# Allegro board Vpwr_v1_2.brd
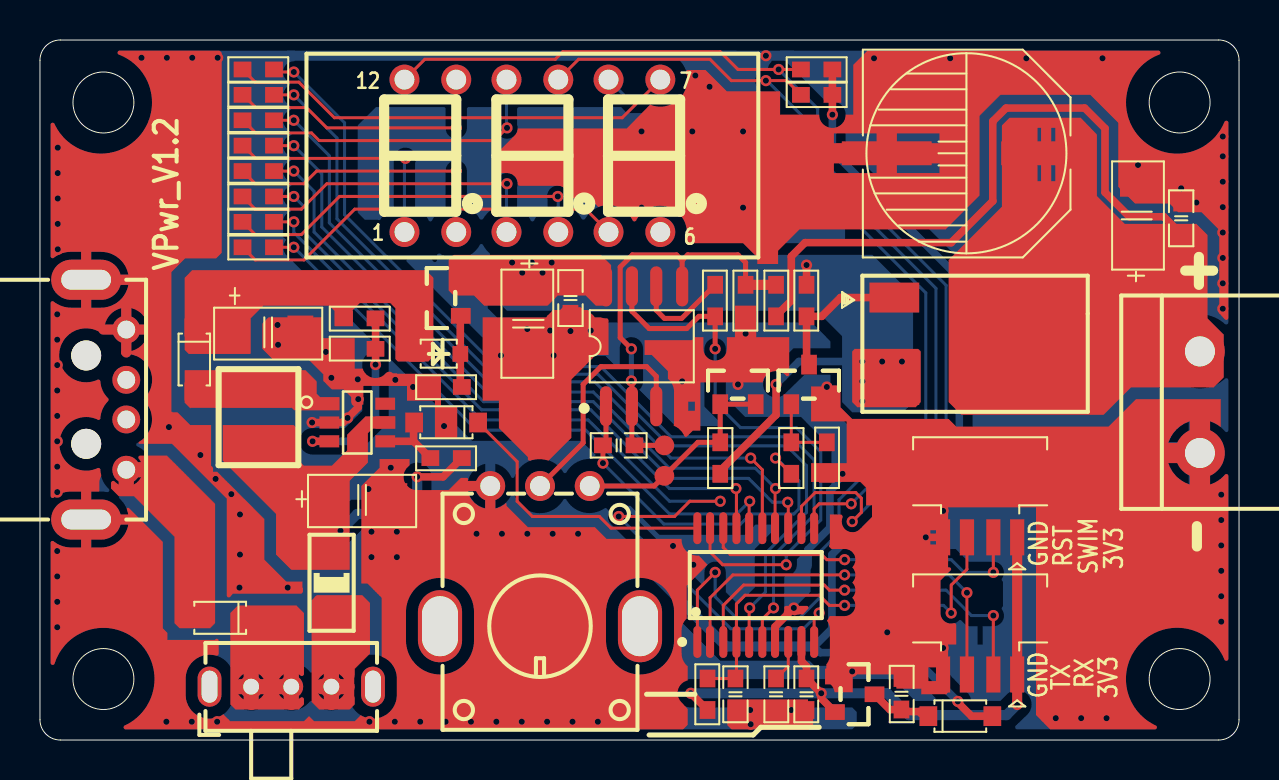
[diagram p0: board, top side]
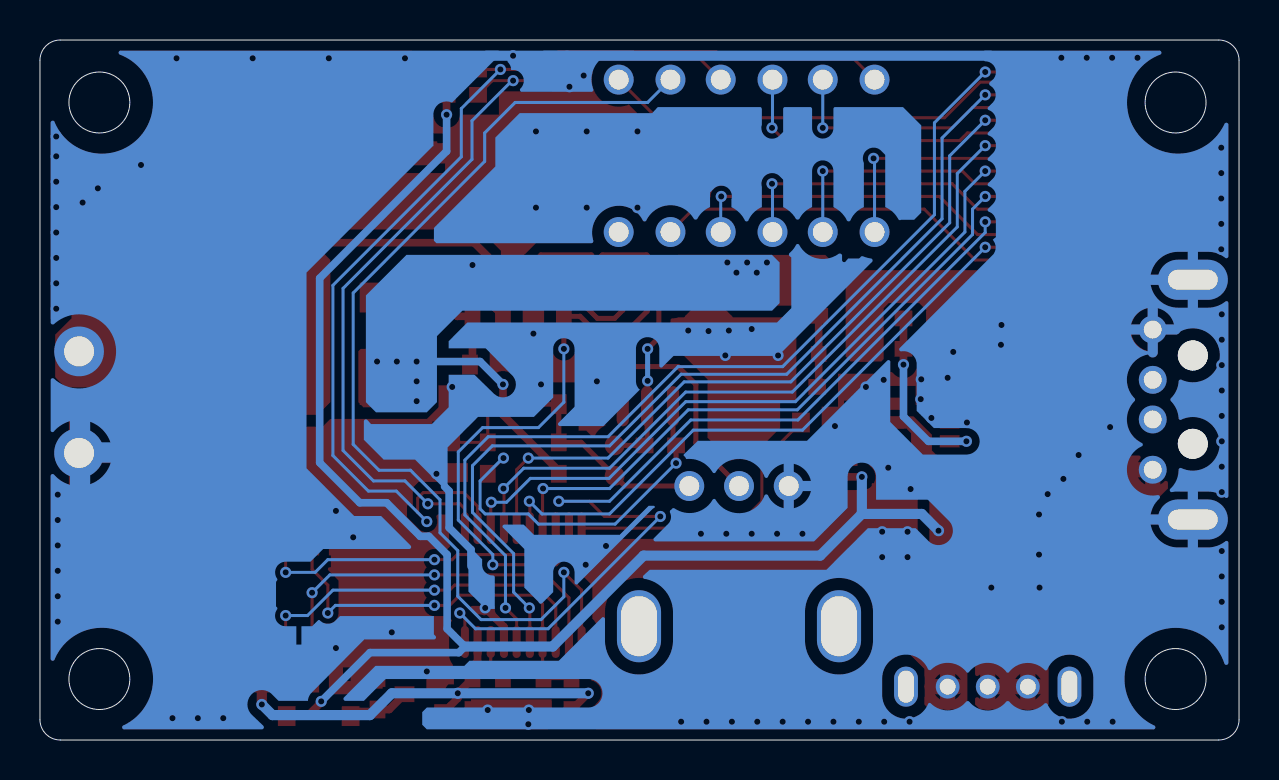
[diagram p1: board, bottom side, seen from below]

Outline 59.99 x 35 mm; copper layers: TOP, BOTTOM. Coordinates in mm from the lower left corner of the outline.
Outline path: circle c3.17,31.88 r1.52 ; circle c3.17,3.05 r1.52 ; circle c57.02,31.88 r1.52 ; circle c57.02,3.05 r1.52 ; 0,33.99 0,1.02 arc(0.3,0.3) 1.02,0 58.98,0 arc(59.7,0.3) 59.99,1.02 59.99,33.99 arc(59.7,34.7) 58.98,35 1.02,35 arc(0.3,34.7) 0,33.99

## Design rules (mm)
net group POWER: nets GND VCPU VIN VIN_12V VOUT VUSB

## Placement (name value [footprint] x y rotation side)
C1  1uF/10V  [C0603]  36.83 2.29 270 top
C2  0.1uF/50V  [C0603]  26.54 22.1 270 top
C3  1uF/16V  [C0603]  43.1 2.31 270 top
C4  0.1uF/50V  [C0603]  34.8 2.29 270 top
C5  1uF/16V  [C0603]  38.35 2.29 90 top
C6  22uF  [TA3216]  16.13 11.94 0 top
C7  22uF/25V  [TA3216]  11.43 20.32 0 top
C8  22uF/25V  [TA3216]  24.38 20.83 270 top
C9  470uF/25V  [C_SMD_10X10_3]  46.35 29.34 180 top
C10  22uF/25V  [TA3216]  54.94 26.21 90 top
C11  0.1uF/50V  [C0603]  57.1 26.09 90 top
C12  0.01uF/50V  [C0603]  28.96 14.73 0 top
D1  SS14  [SOD123]  9.02 6.1 0 top
D2  SS14/NC  [SOD123]  20.32 15.88 0 top
D3  MM3Z9V1/NC  [SOD323]  19.94 19.3 0 top
D4  SS14  [SOD123]  7.72 19.02 90 top
D5  SS14  [SOD123]  46.05 1.19 180 top
DS1  SLR0283DBA1BD  [LED-SEG-TH_SLR0283DBA1BD]  24.64 29.21 0 top
F1  1A/16V  [FULSE1206]  14.61 7.87 90 top
J1  Download  [1_25_PWT_4P]  46.99 12.83 180 top
J2  UART1  [1_25_PWT_4P]  46.99 5.97 180 top
J3  B2S  [CH5R08-2A]  58.04 16.89 90 top
L1  4.7uH  [SM3521]  10.92 16.13 90 top
NOREF  -  []  0 33.99 0 top
NOREF#2  -  []  1.02 0 90 top
Q1  2SB772-P  [TO252-132]  45.85 19.81 270 top
Q2  AO3401  [SOT-23]  20.07 22.1 90 top
Q3  MMBT5551  [SOT-23]  38.48 17.78 0 top
Q4  TL431ACD  [SOT-23]  34.92 17.78 0 top
R1  10K  [R0603]  33.4 2.29 270 top
R2  100R  [R0603]  10.92 32.26 0 top
R3  100R  [R0603]  10.92 33.53 0 top
R4  100R  [R0603]  10.92 25.91 0 top
R5  100R  [R0603]  10.92 28.45 0 top
R6  100R  [R0603]  10.92 29.72 0 top
R7  100R  [R0603]  10.92 30.99 0 top
R8  100R  [R0603]  10.92 24.64 0 top
R9  100R  [R0603]  10.92 27.18 0 top
R10  191K/1%  [R0603]  16 21.08 180 top
R11  100K  [R0603]  20.32 14.1 180 top
R12  10K/1%  [R0603]  16 19.56 0 top
R13  3K  [R0603]  34.04 14.1 270 top
R14  10K  [R0603]  38.35 21.97 90 top
R15  3K/1%  [R0603]  36.83 21.97 270 top
R16  3K  [R0603]  37.59 14.1 90 top
R17  10K  [R0603]  20.32 17.65 0 top
R18  3K  [R0603]  39.37 14.1 90 top
R19  1K/1%  [R0603]  35.31 21.97 90 top
R20  100R  [R0603]  33.78 21.97 90 top
R21  200R  [R0603]  38.86 33.53 180 top
R22  200R  [R0603]  38.86 32.26 180 top
SW1  SPDT-SW  [SK-12D02-VG3]  12.57 2.67 0 top
TP1  VUSB_IN  [TP-40MIL-SMT]  7.37 7.87 0 top
TP2  VUSB  [TP-40MIL-SMT]  12.57 10.41 0 top
TP3  VIN_12V  [TP-40MIL-SMT]  8.05 22.48 0 top
TP4  VIN  [TP-40MIL-SMT]  22.48 23.37 0 top
TP5  VOUT  [TP-40MIL-SMT]  52.7 26.29 0 top
TP6  TEST_POINT  [TP-40MIL-SMT]  31.24 13.21 90 top
TP7  FEEDBACK  [TP-40MIL-SMT]  31.24 14.73 0 top
U1  STM8S103F3P6  [TSSOP-20]  35.81 7.75 0 top
U2  SC662K-3.3V  [SOT-23]  40.77 2.29 270 top
U3  SX1308  [SOT-23-6]  15.88 15.88 0 top
U4  LM358  [SOIC-8]  30.23 19.68 90 top
USB1  USB_A  [USB-A-M-DIP]  4.32 17.02 270 top
VR1  10K  [RK09K]  25.02 12.7 180 top

## Library data of the parts
C1-C5 C11 C12 = CAP NP
C6-C8 C10 = CAP TAC
C9 = CAP POL
D1 D2 D4 D5 = DIO_SCHOTTKY_0
D3 = DIO_ZENER
DS1 = SLR0283DBA1BD
F1 = FUSE_0
J1 J2 = SMT-CON-4P-1R25
J3 = B2S
L1 = INDUCTANCE
Q1 = PNP
Q2 = AO3401
Q3 = NPN
Q4 = TL431ACD
R1-R22 = R
SW1 = SPDT-SW
TP1-TP7 = TEST_POINT
U1 = STM8S103F3P6: User Part Number: partnum; Tolerance: RichardLC
U2 = SC662K-3.3V
U3 = SX1308
U4 = LM358
USB1 = USB_A
VR1 = POT_R_S

## Footprints (pads in the part's own frame, mm; a bottom-side part is the same pattern mirrored in y, then rotated)
1_25_PWT_4P
  rect 0.711x1.803 smd: 1(-1.905,2.692) 2(-0.711,2.692) 3(0.61,2.692) 4(1.803,2.692)
  rect 2.108x2.997 smd: 5(-4.699,-0.406) 6(4.597,-0.406)
C0603
  rect 0.889x0.787 smd: 1(-0.787,0) 2(0.787,0)
C_SMD_10X10_3
  rect 4.496x1.194 smd: 1(-3.988,0) 2(3.988,0)
CH5R08-2A
  round 2.489 hole 1.499: 1(-2.54,0) 2(2.54,0)
FULSE1206
  rect 1.397x1.702 smd: 1(-1.397,0) 2(1.397,0)
LED-SEG-TH_SLR0283DBA1BD
  round 1.499 hole 0.991: 1(-6.401,-3.81) 2(-3.81,-3.81) 3(-1.295,-3.81) 4(1.295,-3.81) 5(3.81,-3.81) 6(6.401,-3.81) 7(6.401,3.81) 8(3.81,3.81) 9(1.295,3.81) 10(-1.295,3.81) 11(-3.81,3.81) 12(-6.401,3.81)
R0603
  rect 0.889x0.787 smd: 1(-0.787,0) 2(0.787,0)
RK09K
  oval 2.21x3.607 hole 1.803x2.997: (-5.004,7.01) (5.004,7.01)
  round 1.499 hole 0.991: 1(-2.489,0) 2(0,0) 3(2.489,0)
SK-12D02-VG3
  round 1.194 hole 0.787: 1(-2.007,0) 2(0,0) 3(2.007,0)
  oval 1.194x2.007 hole 0.787x1.6: 4(-4.089,0) 5(4.089,0)
SM3521
  rect 1.6x3.302 smd: 1(-1.295,0) 2(1.295,0)
SOD123
  rect 0.889x0.991 smd: 1(-1.6,0) 2(1.6,0)
SOD323
  rect 0.787x0.787 smd: 1(-1.092,0) 2(1.092,0)
SOIC-8
  oval 2.007x0.61 smd: 1(-2.997,1.905) 2(-2.997,0.61) 3(-2.997,-0.61) 4(-2.997,-1.905) 5(2.997,-1.905) 6(2.997,-0.61) 7(2.997,0.61) 8(2.997,1.905)
SOT-23
  rect 0.787x0.991 smd: 1(-0.889,-0.991) 2(0.889,-0.991) 3(0,0.991)
SOT-23-6
  rect 0.991x0.61 smd: 1(-1.397,0.94) 2(-1.397,0) 3(-1.397,-0.94) 4(1.397,-0.94) 5(1.397,0) 6(1.397,0.94)
TA3216
  rect 1.295x1.803 smd: 1(-1.6,0) 2(1.6,0)
TO252-132
  rect 1.499x2.489 smd: 1(-2.311,-3.099) 2(2.311,-3.099)
  rect 6.096x6.604 smd: 3(0,3.099)
TP-40MIL-SMT
  round 0.991 smd: 1(0,0)
TSSOP-20
  oval 0.406x1.6 smd: 1(-2.921,-2.845) 2(-2.286,-2.845) 3(-1.626,-2.845) 4(-0.965,-2.845) 5(-0.33,-2.845) 6(0.33,-2.845) 7(0.965,-2.845) 8(1.626,-2.845) 9(2.286,-2.845) 10(2.921,-2.845) 11(2.921,2.845) 12(2.286,2.845) 13(1.626,2.845) 14(0.965,2.845) 15(0.33,2.845) 16(-0.33,2.845) 17(-0.965,2.845) 18(-1.626,2.845) 19(-2.286,2.845) 20(-2.921,2.845)
USB-A-M-DIP
  round 1.499 hole 1.499 unplated: (-2.21,-2.007) (2.21,-2.007)
  round 1.397 hole 0.889: 1(3.505,0) 2(0.991,0) 3(-0.991,0) 4(-3.505,0)
  oval 2.007x3.505 hole 0.991x2.489: 5(-5.994,-2.007) 6(5.994,-2.007)

## Nets
GND: C1.2 C2.2 C3.1 C4.2 C5.1 C6.2 C7.2 C8.2 C9.2 C10.2 C11.2 J1.4 J1.5 J1.6 J2.4 J2.5 J2.6 J3.1 Q3.2(EMITTER) Q4.3(A) R12.1 R17.1 R18.1 R19.1 U1.7(VSS) U2.1(GND) U3.2(GND) U4.4(VEE/GND) USB1.4(GND) USB1.5 USB1.6 VR1.3(B)
VIN: C2.1 C8.1 Q1.2(EMITTER) Q2.2(S) R13.2 R14.2 TP4.1 U4.8(VCC)
VIN_12V: C7.1 D3.1(CATHODE) D4.2(CATHODE) Q2.3(D) R10.2 TP3.1
FEEDBACK: C12.2 R15.1 R19.2 TP7.1 U4.2(PA-) U4.5(PB+)
NRST: C4.1 J1.3 R1.1 U1.4(NRST)
PA1: R2.2 U1.5(OSCIN/PA1)
PA2: R3.2 U1.6(OSCOUT/PA2)
PA3: R4.2 U1.10(PA3(HS)/TIM2_CH3/[SPI_NSS])
PB4: DS1.12(S1) R21.2 U1.12([ADC_ETR]I2C_SCL/(T)PB4)
PB5: DS1.9(S2) R22.2 U1.11([TIM1_BKIN]I2C_SDA /(T)PB5)
PC3: R5.2 U1.13([TIM1_CH1N][TLI]/TIM1_CH3/(HS)P)
PC4: R6.2 U1.14([TIM1_CH2N][AIN2]/CLK_CCO/TIM1_)
PC5: R7.2 U1.15([TIM2_CH1]SPI_SCK/(HS)PC5)
PC6: R8.2 U1.16([TIM1_CH1]/SPI_MOSI/(HS)PC6)
PC7: R9.2 U1.17([TIM1_CH2]SPI_MISO/(HS)PC7)
PD4: DS1.8(S3) U1.1(PD4(HS)/BEEP/TIM2_CH1 /UART1_CK)
PWR_ADC: R20.1 U1.19([TIM2_CH3][AIN3]/(HS)PD2) U4.7(OUTB)
PWR_EN: D2.2(CATHODE) U1.20(ADC_ETR/TIM2_CH2/AIN4/(HS)PD3)
SWIM: J1.2 U1.18(SWIM/(HS)PD1)
UART1_RX: J2.2 U1.3(PD6(HS) /AIN6/UART1_RX)
UART1_TX: J2.3 U1.2(PD5(HS) /AIN5/UART1_TX)
VCPU: C5.2 J1.1 J2.1 R1.2 U1.9(VDD) U2.2(OUT)
VOUT: C9.1 C10.1 C11.1 J3.2 Q1.3(COLLECTOR) R15.2 TP5.1
VUSB: C6.1 D5.1(ANODE) F1.2 L1.1 R11.1 R21.1 R22.1 TP2.1 U3.5(IN)
N00393: D2.1(ANODE) R11.2 U3.4(EN)
N00543: D4.1(ANODE) L1.2 U3.1(SW)
N00703: R10.1 R12.2 U3.3(FB)
N01703: D3.2(ANODE) Q2.1(G) R17.2
N02157: Q4.1(REF) Q4.2(K) R13.1 TP6.1 VR1.1(A)
N02990: U4.3(PA+) VR1.2(WIPER)
N03269: C12.1 R16.1 U4.1(OUTA)
N03332: Q3.1(BASE) R16.2 R18.2
N03752: Q1.1(BASE) Q3.3(COLLECTOR) R14.1
N09921: D1.1(ANODE) TP1.1 USB1.1(VCC)
N12112: R20.2 U4.6(PB-)
N13304: C3.2 D5.2(CATHODE) U2.3(VIN)
N13906: C1.1 U1.8(VCAP)
N18844: DS1.11(A) R2.1
N18892: DS1.7(B) R3.1
N19204: DS1.4(C) R4.1
N19214: DS1.2(D) R5.1
N19218: DS1.1(E) R6.1
N19222: DS1.10(F) R7.1
N19226: DS1.5(G) R8.1
N19230: DS1.3(DP) R9.1
N28022: D1.2(CATHODE) SW1.1 SW1.2
N28031: F1.1 SW1.3

Pads without a net: DS1 6; SW1 4 5; U3 6; USB1 2 3

## Via types
v1: diameter 0.559, hole 0.305, TOP to BOTTOM, 183 vias

## Routing (per net, layer and track width the routed paths; a pad name or vN(x,y) marks a point on that pad's centre or on a via; arc(x,y) is an arc through that point)
GND: length 115.4
  TOP w0.381: C8.2 v1(25.7,19.23) ; C8.2 v1(23.06,19.23) ; C8.2 v1(24.38,20.55) ; v1(57.86,26.87) C11.2 v1(57.1,27.58) ; v1(25.53,20.47) 25.53,21.08 25.76,21.31 C2.2 ; v1(45.19,4.6) J2.4 45.09,3.28 ; Q3.2 v1(39.37,17.65) ; 54.94,27.81 v1(54.94,28.75) ; U1.7 36.78,5.66 v1(37.72,6.6) ; v1(44.32,10.13) J1.4 v1(45.19,11.46) ; C2.2 27.33,21.31 27.56,21.08 v1(27.56,20.47) ; C2.2 v1(26.54,20.45) ; C4.2 v1(35.53,1.5) ; R18.1 v1(40.16,13.31) ; Q4.3 v1(34.92,17.78) ; U4.4 v1(32.13,17.93) ; v1(13.61,15.88) U3.2 15.16,15.88 v1(15.39,16.1) 15.93,16.64 v1(15.93,17.04) ; C1.2 v1(37.59,1.5) C5.1 ; R19.1 v1(35.31,20.32) ; R17.1 v1(18.67,17.65)
  TOP w0.508: USB1.5 4.5,23.01 ; USB1.5 2.31,21.56 ; USB1.5 2.31,24.46 ; 4.32,19.38 USB1.4 ; USB1.4 4.32,21.67 ; USB1.4 3.17,20.52 ; USB1.4 5.46,20.52 ; 2.31,9.58 USB1.6 ; USB1.6 4.5,11.02 ; USB1.6 2.31,12.47 ; 22.53,11.51 VR1.3 21.34,12.7
  TOP w1.016: C9.2 42.37,28.22 ; C9.2 39.6,29.34 ; C9.2 42.37,30.45 ; C9.2 45.14,29.34 ; J3.1 56.36,14.35 ; J3.1 58.04,12.67 ; J3.1 58.04,16.03
  BOTTOM w0.381: 38.43,8.69 38.43,9.53 39.52,10.62 39.52,12.45 39.75,12.67
  BOTTOM w0.508: USB1.6 4.5,11.02 ; USB1.6 2.31,12.47 ; USB1.6 2.31,9.58 ; USB1.4 3.17,20.52 ; USB1.4 4.32,21.67 ; USB1.4 4.32,19.38 ; USB1.4 5.46,20.52 ; USB1.5 4.5,23.01 ; USB1.5 2.31,21.56 ; USB1.5 2.31,24.46 ; 12.42,34.21 v1(36.32,34.21) 37.67,34.21 ; VR1.3 22.53,13.89 ; VR1.3 22.53,11.51 ; VR1.3 21.34,12.7 ; J3.1 58.04,16.03 ; J3.1 56.36,14.35 ; J3.1 58.04,12.67
  BOTTOM w1.016: 57.99,14.38 57.99,12.7 ; 57.99,14.38 57.99,16.05 ; 57.99,14.38 56.31,14.38
  vias: v1(0.89,29.62) v1(0.89,28.35) v1(0.89,27.08) v1(0.89,25.81) v1(0.89,24.54) v1(0.86,21.29) v1(0.86,20.02) v1(0.86,18.75) v1(0.86,17.48) v1(0.86,16.21) v1(0.86,14.94) v1(0.86,13.67) v1(0.86,12.4) v1(0.86,9.45) v1(0.86,8.18) v1(0.86,6.91) v1(0.86,5.64) v1(5.08,34.11) v1(6.35,34.11) v1(6.32,0.91) v1(6.45,15.65) v1(7.62,34.11) v1(7.59,0.91) v1(8.03,14.25) v1(8.79,13.06) v1(8.89,34.11) v1(8.86,0.91) v1(9.58,12.29) v1(10.01,11.28) v1(10.01,9.27) v1(9.98,7.62) v1(11.89,20.75) v1(11.91,19.76) v1(12.4,7.62) v1(14.3,19.41) v1(14.58,18.11) v1(15.9,18.03) v1(16.43,12.55) v1(16.48,0.91) v1(16.59,10.41) v1(16.59,9.14) v1(17.55,13.61) v1(17.78,18.01) v1(17.75,0.91) v1(17.86,10.41) v1(17.86,9.14) v1(19.02,0.91) v1(20.22,15.7) v1(20.29,0.91) v1(21.56,0.91) v1(21.84,10.31) v1(22.83,0.91) v1(23.11,10.31) v1(24.1,0.91) v1(24.38,10.31) v1(25.37,0.91) v1(25.65,10.31) v1(26.64,0.91) v1(26.92,10.31) v1(27.91,0.91) v1(30.1,30.43) v1(30.1,26.62) v1(31.67,9.7) v1(32.64,30.43) v1(32.64,26.62) v1(32.69,8.76) v1(32.79,33.22) v1(33.5,32.66) v1(35.18,30.43) v1(35.18,26.62) v1(35.56,0.79) v1(40.64,3.43) v1(41.73,34.09) v1(42.39,5.38) v1(45.54,34.09) v1(49.35,34.09) v1(50.83,1.09) v1(52.1,1.09) v1(53.16,34.09) v1(53.37,1.09) v1(59.11,12.27) v1(59.11,11) v1(59.11,9.73) v1(59.11,8.46) v1(59.11,7.19) v1(59.11,5.92) v1(59.18,30.18) v1(59.18,29.18) v1(59.18,27.91) v1(59.18,26.64) v1(59.18,25.37) v1(59.18,24.1) v1(59.18,22.83) v1(59.18,21.56)
VIN: length 11.4
  TOP w0.381: R13.2 34.04,13.46 36.83,16.26 v1(36.83,17.78) ; R14.2 v1(38.35,23.75)
  BOTTOM w0.381: v1(36.83,17.78) 37.97,18.92 v1(41.15,18.92)
  vias: v1(23.62,23.88) v1(24.13,23.37) v1(24.61,23.88) v1(25.15,23.37) v1(25.6,23.88) v1(41.15,17.93) v1(41.15,16.94) v1(42.14,18.92) v1(43.13,18.92)
FEEDBACK: length 21.6
  TOP w0.152: 29.62,19.53 v1(29.59,19.56)
  TOP w0.254: R19.2 35.31,23.88 34.92,24.26 32.41,24.26 32.13,23.98 ; 32.13,23.98 31.85,24.26 29.64,24.26 29.03,23.65 29.03,20.12 v1(29.59,19.56) ; 32.13,23.98 U4.5 ; v1(29.59,17.96) 29.62,17.98 U4.2 29.62,14.86 C12.2 TP7.1
  TOP w0.508: R15.1 R19.2
  BOTTOM w0.254: v1(29.59,19.56) v1(29.59,17.96)
NRST: length 20.6
  TOP w0.152: J1.3 46.38,8.53 45.59,7.75 v1(45.59,6.35) ; R1.1 C4.1 34.85,3.12 U1.4 34.85,6.81 35.28,7.24 38.99,7.24 39.5,6.73 v1(40.26,6.73)
  BOTTOM w0.152: v1(40.26,6.73) 45.21,6.73 v1(45.59,6.35)
PA1: length 46.7
  TOP w0.152: R2.2 v1(12.7,32.26) ; U1.5 35.48,6.58 v1(35.51,6.6)
  BOTTOM w0.152: v1(12.7,32.26) 14.86,30.1 14.86,26.06 22.63,18.29 27.91,18.29 31.5,14.71 37.36,14.71 38.35,13.72 38.35,11.38 36.3,9.32 36.3,7.39 v1(35.51,6.6)
PA2: length 48
  TOP w0.152: U1.6 36.14,6.05 v1(36.7,6.6) ; R3.2 11.84,33.4 v1(12.7,33.4)
  BOTTOM w0.152: v1(12.7,33.4) 15.24,30.86 15.24,26.26 22.83,18.67 28.07,18.67 31.57,15.16 37.57,15.16 38.73,14 38.73,11.25 36.7,9.22 v1(36.7,6.6)
PA3: length 48.1
  TOP w0.152: v1(28.96,11.18) 31.75,11.18 32.51,11.94 v1(34.04,11.94) ; U1.10 38.73,6.1 v1(38.99,6.35) ; R4.2 v1(12.7,25.91)
  BOTTOM w0.152: v1(28.96,11.18) 34.57,5.56 38.2,5.56 v1(38.99,6.35) ; v1(34.04,11.94) 31.5,11.94 27.43,16 22.07,16 12.7,25.37 v1(12.7,25.91)
PB4: length 55.5
  TOP w0.152: v1(40.64,10.92) 41.1,11.38 41.1,12.09 40.82,12.37 38.79,12.37 38.1,11.68 U1.12 ; R21.2 v1(36.96,33.53) 34.92,33.53 34.04,34.42 26.16,34.42 25.78,34.04 19.25,34.04 DS1.12
  BOTTOM w0.152: v1(40.64,10.92) 42.16,12.45 43.56,12.45 45.34,14.22 45.34,22.73 38.91,29.16 38.91,31.57 v1(36.96,33.53)
PB5: length 43.6
  TOP w0.152: DS1.9 26.95,34.04 33.53,34.04 34.59,32.97 v1(36.32,32.97) 37.36,32.97 R22.2 ; v1(40.59,11.81) 38.99,11.81 38.73,11.56 U1.11
  BOTTOM w0.152: v1(40.59,11.81) 41.73,12.95 43.31,12.95 44.83,14.48 44.83,22.58 38.38,29.03 38.38,30.96 36.37,32.97 v1(36.32,32.97)
PC3: length 35.1
  TOP w0.152: v1(37.41,11.89) 37.44,11.86 U1.13 ; R5.2 v1(12.7,28.45)
  BOTTOM w0.152: v1(37.41,11.89) 36.65,11.89 35.46,13.08 31.52,13.08 27.69,16.92 22.2,16.92 13.72,25.4 13.72,27.43 v1(12.7,28.45)
PC4: length 35.8
  TOP w0.152: R6.2 v1(12.7,29.72) ; v1(36.8,12.57) 36.78,12.55 U1.14
  BOTTOM w0.152: v1(36.8,12.57) 35.79,13.59 31.5,13.59 27.69,17.4 22.35,17.4 14.1,25.65 14.1,28.32 v1(12.7,29.72)
PC5: length 36.6
  TOP w0.152: U1.15 36.14,13.51 v1(35.56,14.1) ; R7.2 v1(12.7,30.99)
  BOTTOM w0.152: v1(12.7,30.99) 14.48,29.21 14.48,25.86 22.43,17.91 27.76,17.91 31.57,14.1 v1(35.56,14.1)
PC6: length 30.9
  TOP w0.152: U1.16 35.48,11.91 v1(35.51,11.94) ; R8.2 v1(12.7,24.64)
  BOTTOM w0.152: v1(35.51,11.94) 34.87,11.3 31.5,11.3 27.3,15.49 21.84,15.49 v1(12.7,24.64)
PC7: length 31.9
  TOP w0.152: U1.17 34.85,12.55 v1(34.82,12.57) ; R9.2 v1(12.7,27.18)
  BOTTOM w0.152: v1(34.82,12.57) 31.5,12.57 27.56,16.51 22.1,16.51 13.34,25.27 13.34,26.54 v1(12.7,27.18)
PD4: length 50.7
  TOP w0.152: U1.1 32.89,7.49 v1(33.78,8.38)
  BOTTOM w0.152: DS1.8 29.59,31.88 36.22,31.88 37.74,30.35 37.74,28.93 44.32,22.35 44.32,14.78 43.03,13.49 41.45,13.49 39.98,12.01 39.98,10.36 39.09,9.47 39.09,7.19 37.92,6.02 34.92,6.02 33.78,7.16 v1(33.78,8.38)
PWR_ADC: length 28.2
  TOP w0.152: v1(37.34,8.76) 34.16,8.76 33.53,9.4 U1.19
  TOP w0.254: U4.7 29.62,21.44 30.48,20.57 32.36,20.57 32.97,21.18 R20.1 v1(33.78,19.56)
  BOTTOM w0.152: v1(33.78,19.56) 33.78,16.89 35.05,15.62 37.85,15.62 39.07,14.4 39.07,11 37.34,9.27 v1(37.34,8.76)
PWR_EN: length 14.3
  TOP w0.152: U1.20 28.57,10.59 27.99,11.18 24.64,11.18 23.88,11.94 23.88,13.92 D2.2
SWIM: length 16.7
  TOP w0.152: J1.2 v1(47.7,8.38) ; U1.18 34.19,9.63 34.54,9.27 39.12,9.27 39.37,9.02 v1(40.26,9.02)
  BOTTOM w0.152: v1(40.26,9.02) 45.59,9.02 46.23,8.38 v1(47.7,8.38)
UART1_RX: length 19.3
  TOP w0.152: v1(40.26,7.49) 39.5,7.49 39.24,7.75 35.2,7.75 34.19,6.73 U1.3 ; J2.2 v1(47.7,6.22)
  BOTTOM w0.152: v1(47.7,6.22) 46.61,6.22 45.34,7.49 v1(40.26,7.49)
UART1_TX: length 20
  TOP w0.152: J2.3 v1(46.38,7.37) ; v1(40.26,8.26) 34.67,8.26 33.53,7.11 U1.2
  BOTTOM w0.152: v1(40.26,8.26) 45.49,8.26 v1(46.38,7.37)
VCPU: length 30.7
  TOP w0.381: R1.2 v1(32.56,2.34) ; U2.2 39.09,2.08 v1(39.09,2.34) C5.2 38.35,3.68 38.1,3.94 U1.9
  TOP w0.508: v1(48.9,1.78) J2.1 J1.1
  BOTTOM w0.508: v1(48.9,1.78) 48.36,1.24 43.48,1.24 42.39,2.34 v1(39.09,2.34) v1(32.56,2.34)
VOUT: length 36
  TOP w0.381: R15.2 36.83,21.21 37.59,21.97 37.59,24.18 38.28,24.87 45.59,24.87 47.68,26.95 47.68,30.94 48.34,31.6 52.27,31.6 53.29,30.58 53.29,27.38 54.51,26.16 56.24,26.16 C11.1
  TOP w0.508: 50.34,27.51 C9.1 50.34,30.81
VUSB: length 77.2
  TOP w0.381: R21.1 R22.1 v1(39.65,31.27) ; v1(18.87,13.16) 20.17,13.16 R11.1 ; D5.1 46.61,1.19 45.92,1.88 v1(45.92,1.93)
  BOTTOM w0.381: v1(45.92,1.93) 43.48,4.37 39.04,4.37 38.73,4.67 39.62,5.56 39.62,9.27 40.54,10.19 40.97,10.19 42.65,11.86 43.99,11.86 46,13.87 46,23.09 39.65,29.44 v1(39.65,31.27)
  BOTTOM w0.508: 18.87,11.3 20.95,9.22 29.79,9.22 34.34,4.67 38.73,4.67 ; 18.87,11.3 v1(18.87,13.16) ; 18.87,11.3 15.88,11.3 v1(15.04,10.46)
N00393: length 3.6
  TOP w0.381: 18.69,14.94 18.69,15.85 D2.1 ; 18.69,14.94 U3.4 ; 18.69,14.94 R11.2
N00703: length 9.4
  TOP w0.381: R10.1 R12.2 v1(16.79,18.77) ; U3.3 v1(13.64,14.94)
  BOTTOM w0.381: v1(16.79,18.77) 16.79,16.18 15.54,14.94 v1(13.64,14.94)
N01703: length 3.6
  TOP w0.381: R17.2 21.03,17.73 D3.2 21.03,21.18 Q2.1
N02157: length 11.3
  TOP w0.254: Q4.2 Q4.1 R13.1 32.92,14.88 TP6.1 30.73,12.7 VR1.1
  BOTTOM w0.152: VR1.1 27.51,12.5
N02990: length 11.7
  TOP w0.254: VR1.2 27.18,14.86 27.18,17.78 28.07,18.67 30.35,18.67 30.84,18.19 U4.3
N03269: length 18.4
  TOP w0.152: v1(36.8,14.1) R16.1
  TOP w0.254: v1(28.17,13.84) C12.1 28.32,14.88 U4.1
  BOTTOM w0.152: v1(36.8,14.1) 36.83,14.1 37.97,12.95 37.97,11.56 37.72,11.3 35.56,11.3 35.05,10.79 31.22,10.79 v1(28.17,13.84)
N03332: length 3.7
  TOP w0.152: R18.2 R16.2 Q3.1
N03752: length 7.2
  TOP w0.381: Q3.3 38.35,18.9 R14.1 39.12,21.18 40.06,22.12 Q1.1
N09921: length 1.8
  TOP w0.762: 4.32,12.62 USB1.1 5.21,13.51
N12112: length 5
  TOP w0.254: R20.2 32.11,21.08 31.24,21.08 30.84,21.49 U4.6
N13304: length 3.1
  TOP w0.381: U2.3 42.52,1.52 C3.2 43.21,1.42 43.99,1.42 44.09,1.32 44.32,1.32 D5.2
N13906: length 2.1
  TOP w0.152: U1.8 37.44,3.68 C1.1
N18844: length 13.8
  TOP w0.152: v1(20.83,30.61) 14.35,30.61 13.34,31.62 10.79,31.62 10.16,32.26 R2.1
  BOTTOM w0.152: v1(20.83,30.61) DS1.11
N18892: length 22.7
  TOP w0.152: R3.1 10.77,32.89 12.95,32.89 14.73,31.11 29.13,31.11 DS1.7
N19204: length 18.6
  TOP w0.152: R4.1 10.77,25.27 13.08,25.27 14.99,27.18 v1(25.91,27.18)
  BOTTOM w0.152: DS1.4 25.93,27.15 v1(25.91,27.18)
N19214: length 14.3
  TOP w0.152: R5.1 10.77,27.81 13.21,27.81 13.84,28.45 v1(20.83,28.45)
  BOTTOM w0.152: v1(20.83,28.45) DS1.2
N19218: length 12.1
  TOP w0.152: R6.1 10.16,29.72 10.79,29.08 v1(18.29,29.08)
  BOTTOM w0.152: DS1.1 18.24,29.03 v1(18.29,29.08)
N19222: length 16.3
  TOP w0.152: v1(23.37,30.61) 22.73,29.97 13.97,29.97 13.59,30.35 10.79,30.35 10.16,30.99 R7.1
  BOTTOM w0.152: v1(23.37,30.61) 23.34,30.63 DS1.10
N19226: length 20.1
  TOP w0.152: R8.1 10.77,24 13.21,24 15.75,26.54 27.3,26.54 DS1.5
N19230: length 16.4
  TOP w0.152: R9.1 10.77,26.54 13.08,26.54 14.35,27.81 v1(23.37,27.81)
  BOTTOM w0.152: v1(23.37,27.81) 23.34,27.79 DS1.3
N28022: length 5.7
  TOP w0.762: SW1.1 10.57,1.88 ; SW1.1 10.57,3.45 ; SW1.1 SW1.2 ; SW1.1 10.03,2.67 ; SW1.2 12.57,3.45 ; SW1.2 12.57,1.88
N28031: length 2.8
  TOP w0.762: SW1.3 14.58,1.88 ; SW1.3 14.1,2.67 ; SW1.3 14.58,3.45 ; SW1.3 15.37,2.67

## Copper pours and planes (outline as drawn; the poured copper is in the pictures)
GND on TOP (solid shape): 38.43,1.8 38.68,1.55 38.68,0.76 38.46,0.53 34.59,0.53 34.39,0.74 34.39,2.03 38.43,2.03
GND on TOP (solid shape): 27.56,21.13 28.07,21.13 28.2,21.09 28.35,21.08 28.42,21.05 28.45,20.98 28.45,19.25 27.81,19.25 26.59,18.03 26.59,15.11 25.45,13.97 25.43,13.97 24.98,14.04 24.54,13.97 24.46,13.98 24.41,14.05 24.41,14.15 22.96,15.6 22.96,16.97 22.15,16.97 22.15,21.13 25.65,21.13 26.16,21.64 27.05,21.64
GND on TOP (solid shape): 14.15,20.12 14.17,20.12 14.17,20.09 15.75,20.09 15.75,18.57 16.15,18.57 16.18,18.49 16.7,18.11 17.3,18.34 17.48,18.41 17.65,18.34 17.86,18.34 17.86,18.31 20.07,18.31 20.07,16.66 20.88,16.66 20.88,15.09 19.76,15.09 19.76,16.97 18.36,16.97 18.36,17.7 16.18,17.7 16.18,16.76 16.03,16.76 16,16.74 15.73,16.68 15.57,16.92 15.57,17.14 15.19,17.53 14.61,17.53 14.17,17.96 14.17,18.29 13.46,19 11.68,19 11.13,19.56 11.13,20.83 11.43,21.13 14.15,21.13
GND on TOP (solid shape): outline of 111 points within 30.25,15.16 37.49,21.72
GND on TOP (solid shape): outline of 327 points within 22.94,21 59.46,34.47
GND on TOP (solid shape): outline of 391 points within 38.58,0.53 59.46,17.73
GND on TOP (solid shape): outline of 90 points within 0.53,7.14 13.16,34.47
GND on TOP (solid shape): outline of 608 points within 0.53,0.53 33.4,14.05
GND on BOTTOM (solid shape): 38.38,9.55 38.48,9.59 38.56,9.5 38.56,7.42 37.69,6.55 37.24,6.55 37.24,8.13 37.27,8.2 37.72,8.39 37.87,8.76 37.87,9.04
GND on BOTTOM (solid shape): 29.23,11.67 29.29,11.71 29.54,11.71 30.99,10.26 35.28,10.26 35.79,10.77 36.75,10.77 36.85,10.7 36.8,10.59 35.76,9.55 35.76,7.62 35.13,6.99 35.07,6.93 35.03,6.86 34.96,6.82 34.87,6.83 34.32,7.39 34.32,8.38 33.78,8.92 33.25,8.38 33.25,7.87 33.18,7.78 33.07,7.82 29.34,11.56 29.3,11.58 29.26,11.61
GND on BOTTOM (solid shape): 34.8,34.47 34.87,34.44 34.9,34.37 34.91,34.33 34.92,34.29 35.15,34.06 36.5,34.06 36.59,34 36.58,33.88 36.47,33.73 36.42,33.55 36.42,33.5 36.32,33.5 35.83,33.17 35.94,32.59 35.98,32.49 35.89,32.41 32.38,32.41 32.32,32.46 32.31,32.54 31.95,34.03 30.43,34.21 30.32,34.22 30.28,34.32 30.28,34.47
GND on BOTTOM (solid shape): 22.09,24.8 22.17,24.74 22.31,24.53 22.48,24.36 22.52,24.29 22.5,24.21 22.4,24.13 22.4,21.59 23.11,20.88 38.61,20.88 39.55,19.94 39.55,19.58 37.69,19.58 36.37,18.24 36.37,17.32 37.29,17.32 38.25,18.26 39.55,18.26 39.55,16.64 40.39,15.8 43.43,15.8 43.61,16 43.73,16.03 43.79,15.93 43.79,15.01 42.8,14.02 41.22,14.02 39.78,12.57 39.67,12.54 39.6,12.62 39.6,14.63 38.07,16.15 35.28,16.15 34.32,17.12 34.32,19.56 33.78,20.09 33.25,19.56 33.25,16.66 34.04,15.88 34.07,15.77 33.99,15.7 31.8,15.7 29.97,17.53 30.02,17.55 30.14,17.74 30.18,17.96 30.18,19.56 29.59,20.14 29.01,19.56 29.01,18.72 28.93,18.62 28.83,18.67 28.3,19.2 23.06,19.2 18.36,23.9 18.34,24.01 18.41,24.08 18.61,24.12 18.8,24.18 18.88,24.19 18.98,24.1 19.02,24.08 19.56,24.08 19.68,23.93 19.8,23.9 19.86,24 19.86,24.26 19.89,24.28 19.96,24.32 20.04,24.31 21.12,24.08 22,24.74
GND on BOTTOM (solid shape): outline of 103 points within 15.9,24.84 40.28,31.65
GND on BOTTOM (solid shape): outline of 89 points within 37.03,0.53 59.46,34.47
GND on BOTTOM (solid shape): outline of 1782 points within 0.53,0.53 44.81,34.47
VIN on TOP (solid shape): 44.07,19.43 44.07,16.89 43.81,16.64 40.89,16.64 40.64,16.89 40.64,19.43 40.77,19.56 43.94,19.56
VIN on TOP (solid shape): 28.57,23.75 28.57,21.84 28.45,21.72 27.81,21.72 27.3,22.23 25.91,22.23 25.4,21.72 22.23,21.72 21.72,22.23 20.7,22.23 20.45,22.48 20.45,24 20.7,24.26 28.07,24.26
VIN on BOTTOM (solid shape): 43.69,22.23 43.69,16.89 43.18,16.38 40.64,16.38 40.13,16.89 40.13,20.19 38.86,21.46 23.37,21.46 22.99,21.84 22.99,23.88 23.37,24.26 41.66,24.26
VIN_12V on TOP (solid shape): 19.68,23.11 19.68,19.18 19.43,18.92 17.91,18.92 17.78,19.05 17.78,21.59 17.58,21.79 17.58,21.82 17.55,21.82 17.53,21.84 16,21.84 15.62,21.46 15.62,20.7 14.73,20.7 14.73,21.46 14.48,21.72 11.18,21.72 10.54,21.08 10.54,19.3 7.44,19.3 7.24,19.51 7.24,23.11 7.62,23.5 19.3,23.5
VOUT on TOP (solid shape): 52.88,30.28 52.88,27.2 54.28,25.81 57.86,25.81 58.42,25.25 58.42,21.08 59.23,20.27 59.23,18.14 58.72,17.63 54.58,17.63 53.21,16.26 46.1,16.26 45.47,16.89 45.47,24 48.13,26.67 48.13,27.94 50.8,27.94 50.8,30.61 49.91,30.61 49.91,27.94 48.13,27.94 48.13,30.73 48.51,31.11 52.07,31.11
VUSB on TOP (solid shape): 17.78,15.57 16.64,15.57 16.41,15.34 16.41,13.87 15.49,12.95 15.49,8.51 12.57,8.51 11.81,9.27 11.81,11.3 9.14,13.97 9.14,15.75 12.7,15.75 12.83,15.62 12.83,14.1 13.21,13.72 14.61,13.72 15.37,14.48 15.37,15.27 16.28,16.18 17.78,16.18
N00543 on TOP (solid shape): 13.84,17.93 13.84,17.32 14.02,17.14 14.99,17.14 14.99,16.48 12.73,16.48 12.6,16.61 7.54,16.61 7.52,16.59 7.24,16.87 7.24,18.49 13.28,18.49
N09921 on TOP (solid shape): 4.93,14.16 5.03,14.22 6.35,14.22 8.76,11.81 8.76,5.84 8.51,5.59 6.99,5.59 6.73,5.84 6.73,10.16 4.7,12.19 3.94,12.19 3.56,12.57 3.56,12.85 3.62,12.95 3.73,12.93 4.88,12.9 4.95,14.05
N28022 on TOP (solid shape): outline of 130 points within 9.53,1.52 13.21,6.73
N28031 on TOP (solid shape): outline of 81 points within 13.59,1.52 16.51,7.24

Small or netless copper shapes (teardrops, artwork), in the pictures only: 1 on TOP

## Text on the board
Ref Des/Silkscreen Top: GND | TX | RST | RX | SWIM | 3V3 | VPwr_V1.2
User.7: FIGURE | SIZE | 12.0 | 31.0 | 35.0 | 39.0 | 59.0 | 63.0x31.0 | 98.0x39.0 | 118.0x71.0 | DRILL CHART: TOP to BOTTOM | ALL UNITS ARE IN MILS | PLATED | NON-PLATED | QTY | 505 | 3 | 4 | 15 | 2
